# Altium PCB FLY_ADXL345.pcbdoc
Units mm, origin at the board's own origin, x right, y up, seen from the top; angles counter-clockwise.
Board outline 93.98 x 76.2 mm, 2 copper layers (Top Layer, Bottom Layer); 13 components, 13 nets, 53 pads, 49 vias.
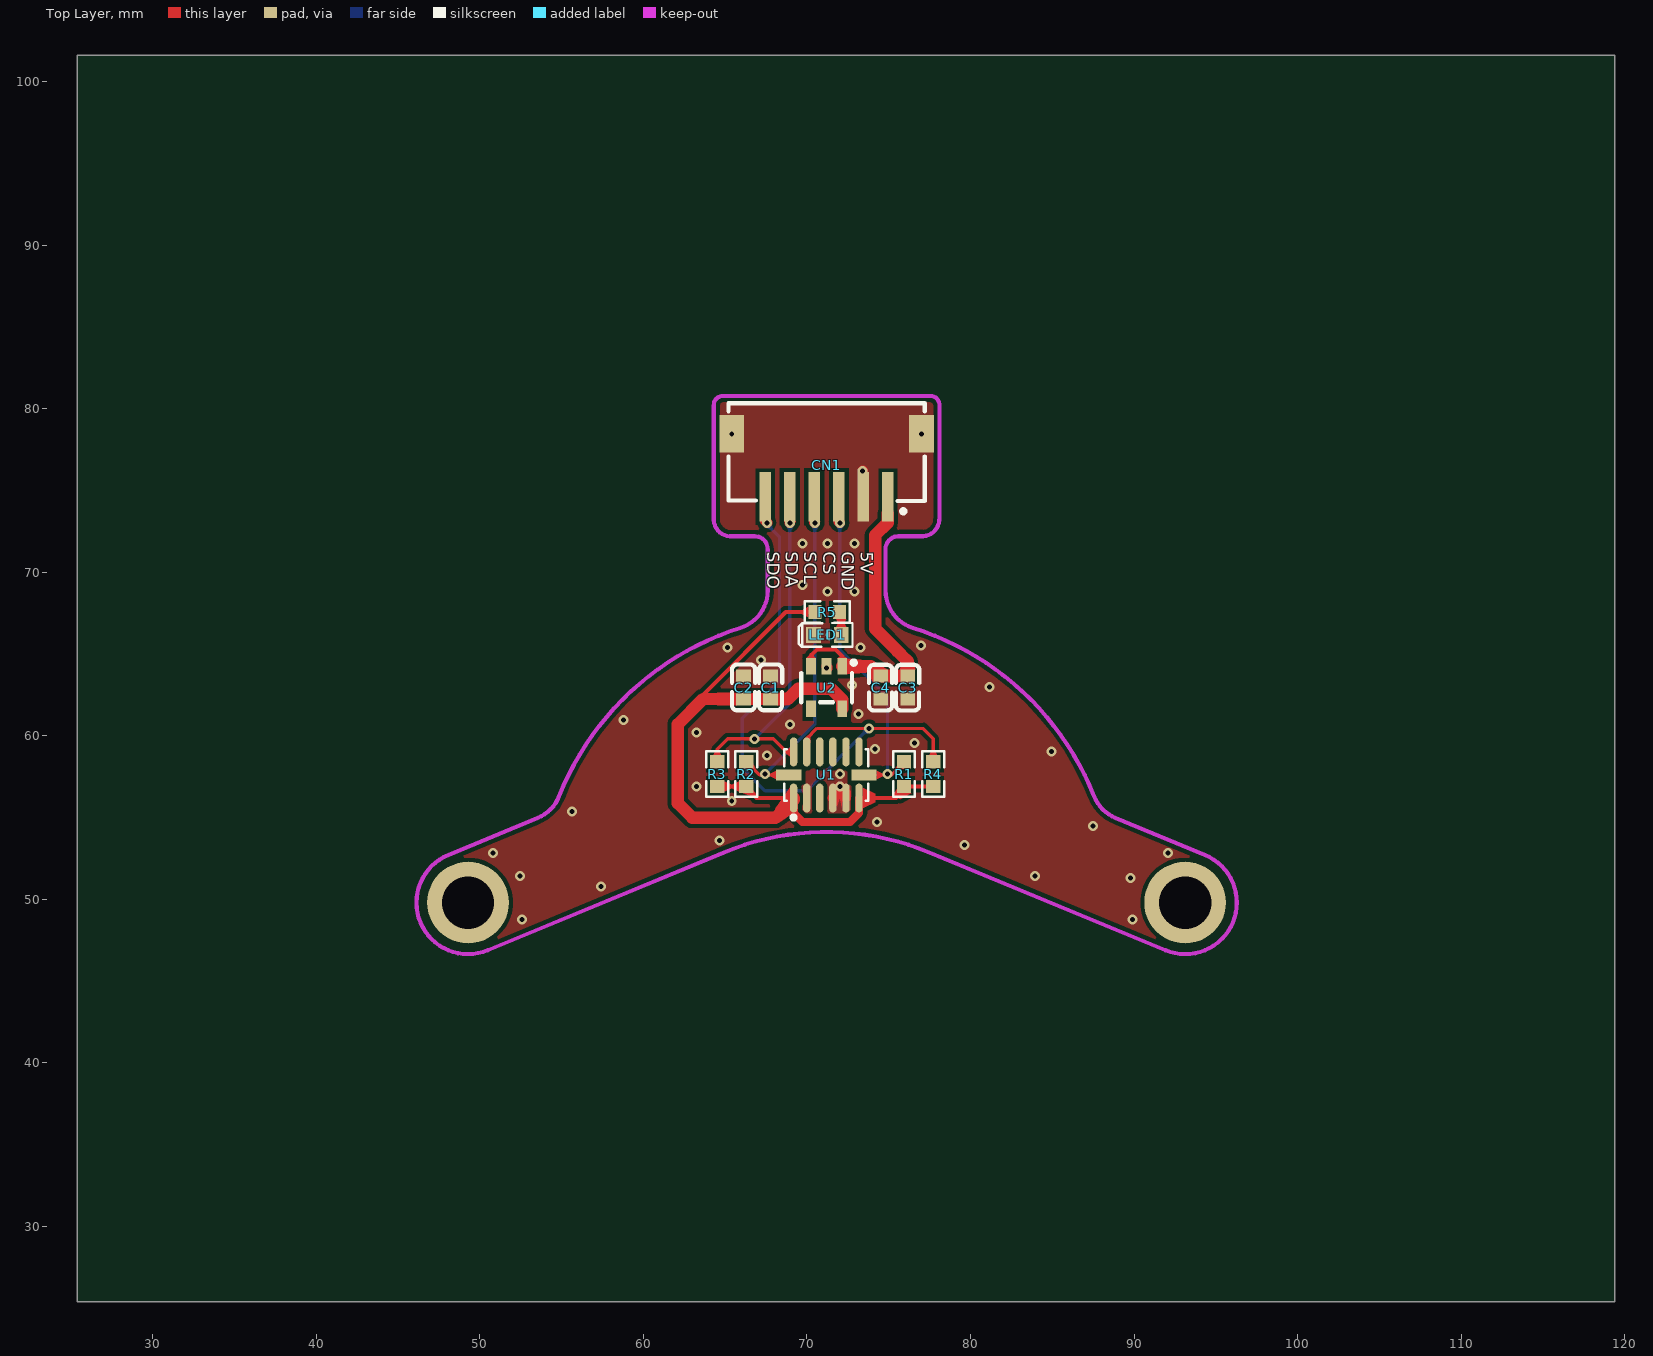
[diagram p0: Top Layer view]
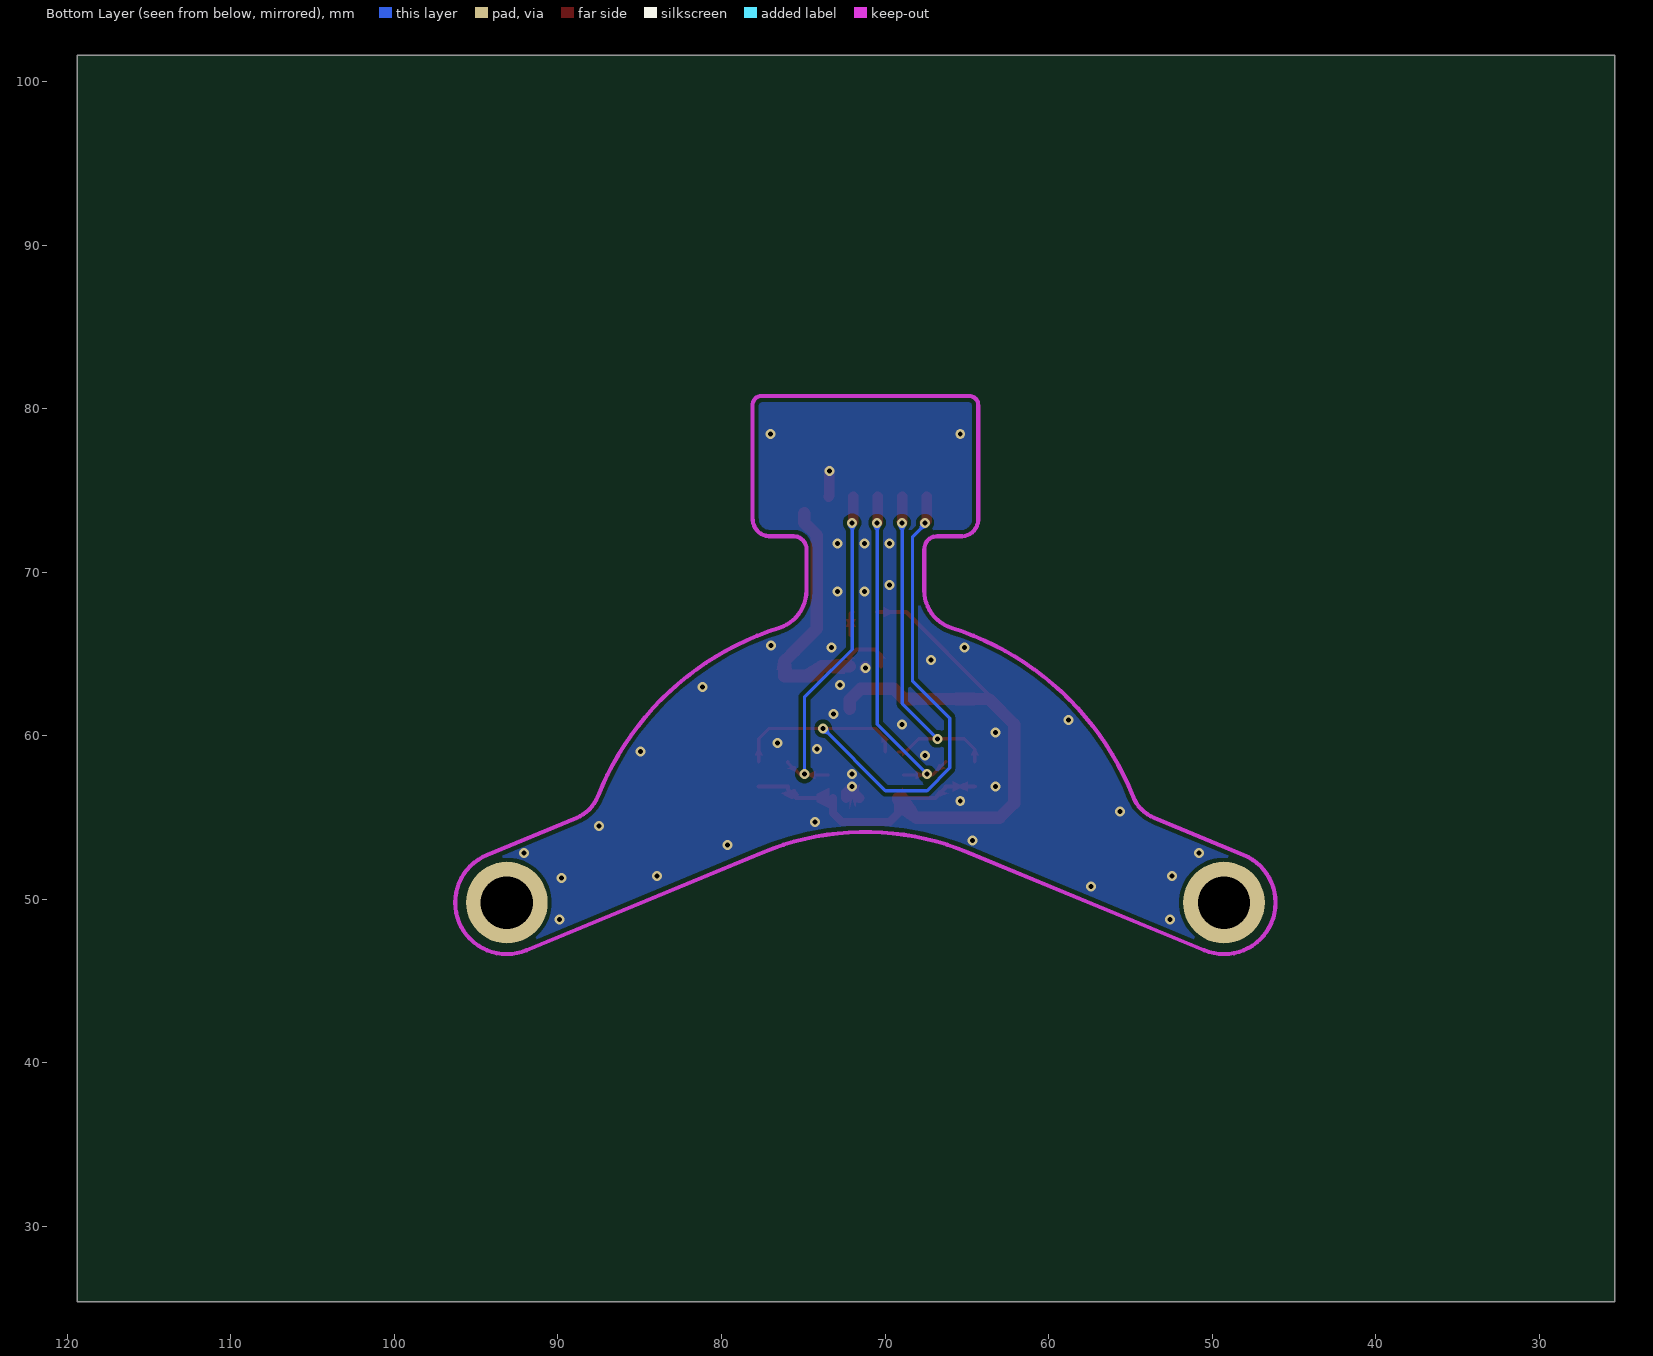
[diagram p1: Bottom Layer view, seen from below]

## Layer stack, top to bottom
Top Solder: solder mask 0.0102, Solder Resist, Dk 3.5
Top Layer: signal copper 0.0356
Dielectric1: dielectric 0.32, FR-4, Dk 4.8
Bottom Layer: signal copper 0.0356
Bottom Solder: solder mask 0.0102, Solder Resist, Dk 3.5

## Board outline
119.38,25.4 25.4,25.4 25.4,101.6 119.38,101.6

## Design rules (kind name [scope] priority, off if disabled: settings)
Clearance [All] p1: gap=0.254 ignorepadtopadclearanceinfootprint=FALSE except(0: Arc-Hole Track-Hole SMDPad-Hole THPad-Hole Via-Hole Fill-Hole Poly-Hole Region-Hole Text-Hole)
PolygonConnect [All] p1: thpad.connectstyle=Relief thpad.reliefconductorwidth=0.254 thpad.reliefentries=4 thpad.polygonreliefangle="90 Angle" thpad.airgapwidth=0.254 smdpad.connectstyle=Direct smdpad.reliefconductorwidth=0.254 smdpad.reliefentries=4 smdpad.polygonreliefangle="90 Angle" smdpad.airgapwidth=0.254 via.connectstyle=Direct via.reliefconductorwidth=0.254 via.reliefentries=4 via.polygonreliefangle="90 Angle" via.airgapwidth=0.254
RoutingVias [All] p1: holewidth=0.711 width=1.27 viastyle="Through Hole" minholewidth=0.711 minwidth=1.27 maxholewidth=0.711 maxwidth=1.27
SolderMaskExpansion [All] p1: expansion=0.102 istentingtop=FALSE
Width [All] p1: maxlimit=0.254 minlimit=0.254 preferedwidth=0.254
30 further rules are at their usual default settings.

## Components (designator, comment, footprint, x,y, rotation, side; value= is the part's Value field where it differs from the comment)
C1 "10uf" C0603 67.776,62.952 r270 top
C2 "100nf" C0603 66.125,62.952 r270 top
C3 "10uf" C0603 76.158,62.952 r90 top
C4 "100nf" C0603 74.507,62.952 r90 top
CN1 "CNJMA1501WR-S-6P" CONN-SMD_CNJMA1501WR-S-6P 71.205,76.541 r180 top
LED1 "LED-0603_R" LED0603_RED 71.247,66.167 r180 top
R1 "10k" R0603 75.946,57.658 r270 top
R2 "4.7k" R0603 66.294,57.658 r270 top
R3 "4.7k" R0603 64.516,57.658 r270 top
R4 "4.7k" R0603 77.724,57.658 r270 top
R5 "1k" R0603 71.247,67.564 r0 top
U1 "ADXL345BCCZ" LGA-14_L5.0-W3.0-P0.80-BL 71.459,57.11 r0 top
U2 "MIC5225-3.3YM5-TR" SOT-23-5_L3.0-W1.7-P0.95-LS2.8-BR 71.205,62.952 r90 top

## Footprints (in the part's own frame and the unit in brackets; to place one, negate y for a bottom-side part, rotate by r counter-clockwise, add the part's x,y. Pads: shape width x height; smd on the part's side, far side on the other; paste and mask are expansions set on the pad)
C0603 [mm]
  rect 0.8x0.9 smd: 1(-0.7,0) 2(0.7,0)
  silkscreen extent -1.41,-0.71 1.39,0.72
CONN-SMD_CNJMA1501WR-S-6P [mm]
  rect 0.7x3 smd: 1(-3.75,1.925) 2(-2.25,1.925) 3(-0.75,1.925) 4(0.75,1.925) 5(2.25,1.925) 6(3.75,1.925)
  rect 1.5x2.3 smd: 7(5.8,-1.925) 8(-5.8,-1.925)
  silkscreen extent -6,-3.79 6,2.94
LED0603_RED [mm]
  rect 0.9x1 smd: 1(-0.85,0) 2(0.85,0)
  silkscreen extent -1.54,-0.73 1.75,0.73
LGA-14_L5.0-W3.0-P0.80-BL [mm]
  oval 0.448x1.769 smd: 1(-2.273,-0.912) 2(-1.473,-0.912) 3(-0.673,-0.912) 4(0.127,-0.912) 5(0.927,-0.912) 6(1.727,-0.912) 8(1.727,1.907) 9(0.927,1.907) 10(0.127,1.907) 11(-0.673,1.907) 12(-1.473,1.907) 13(-2.273,1.907)
  rect 1.545x0.7 smd: 7(2.025,0.497) 14(-2.57,0.497)
  silkscreen extent -2.85,-2.22 2.3,2.07
R0603 [mm]
  rect 0.806x0.864 smd: 1(-0.753,0) 2(0.753,0)
  silkscreen extent -1.39,-0.66 1.39,0.66
SOT-23-5_L3.0-W1.7-P0.95-LS2.8-BR [mm]
  rect 1x0.6 smd: 1(1.3,-0.95) 2(1.3,0) 3(1.3,0.95) 4(-1.3,0.95) 5(-1.3,-0.95)
  silkscreen extent -0.9,-1.78 1.65,1.55

## Free pads (board coordinates)
  round 5 hole 3.2: 1(49.285,49.806) 1(93.125,49.806)
  round 5.08 on Top Solder: 2(49.285,49.806) 2(93.125,49.806)
  round 5.08 on Bottom Solder: 2(49.285,49.806) 2(93.125,49.806)

## Via types
v1: diameter 0.61, hole 0.305, Top Layer to Bottom Layer, 49 vias

## Nets (pads, with @x,y where several pads share a name; then routed paths per layer and width w, separated by ;. In a path a pad name is that pad's centre, name@x,y a point inside that pad or via, vN(x,y) a via of type N, cw(c..) or ccw(c..) an arc to the next point about the centre after c; other vN are vias at no path point)
3V3: C1.2 C2.2 R1.2 R2.2 R3.2 R4.2 R5.1 U1.1 U1.6 U2.5 | length 50
  Top Layer w0.254: 63.65,62.253 63.65,62.507 68.707,67.564 R5.1 ; R3.2 R2.2 66.294,56.832 66.929,56.197 U1.1 ; U1.6 75.438,56.197 75.946,56.706 R1.2 R4.2
  Top Layer w0.508: U1.1 69.187,55.273 69.723,54.737 72.644,54.737 73.188,55.281 U1.6
  Top Layer w0.762: U1.1 69.187,56.106 68.072,54.991 62.992,54.991 62.103,55.88 62.103,60.706 63.65,62.253 C2.2 C1.2 68.857,62.253 69.469,62.865 71.501,62.865 72.156,62.21 U2.5
5V: C3.2 C4.2 CN1.1 U2.1 U2.3 | length 18.9
  Top Layer w0.254: U2.3 70.256,64.922 70.612,65.278 71.755,65.278 72.156,64.877 U2.1
  Top Layer w0.762: U2.1 73.906,64.252 C4.2 C3.2 76.159,64.557 76.073,64.643 75.536,65.18 74.168,66.548 74.168,72.263 74.945,73.04 CN1.1@74.945,73.616
CS: CN1.3 R1.1 U1.7 | length 32.2
  Top Layer w0.203: U1.7 75.184,57.607 75.946,58.369 R1.1
  Top Layer w0.635: CN1.3 71.956,73.078 v1(72.009,73.025)
  Bottom Layer w0.203: 74.422,62.865 72.009,65.278 ; v1(74.93,57.658) 74.93,62.357 72.009,65.278 ; 72.009,65.278 v1(72.009,73.025) 72.009,65.278
GND: C1.1 C2.1 C3.1 C4.1 CN1.2 CN1.7 CN1.8 LED1.2 U1.2 U1.4 U1.5 U2.2 | length 3.5
  Top Layer w0.635: U2.2 71.247,64.211 U2.2@71.247,64.135 ; U1.4 72.009,56.619 v1(72.009,56.896) 72.387,56.518 U1.5 ; v1(73.406,76.2) 73.406,74.666 CN1.2
  other v1: 52.578,48.768 89.916,48.768 57.404,50.8 89.789,51.308 52.451,51.435 83.947,51.435 50.8,52.832 92.075,52.832 79.629,53.34 64.643,53.594 87.503,54.483 74.295,54.737 55.626,55.372 65.405,56.007 63.246,56.896 72.009,57.658 67.564,58.801 84.963,59.055 74.168,59.182 76.581,59.563 63.246,60.198 68.961,60.706 58.801,60.96 73.152,61.341 81.153,62.992 72.771,63.119 71.196,64.135 67.183,64.643 65.151,65.405 73.279,65.405 76.962,65.532 71.247,68.834 72.898,68.834 69.723,69.215 69.723,71.755 71.247,71.755 72.898,71.755 65.405,78.466 77.005,78.466
R5_2: LED1.1 R5.2 | length 1.4
  Top Layer w0.254: R5.2 72.098,67.467 LED1.1
S$679: 
S$681: 
S$688: 
S$690: 
S$696: 
SCL: CN1.4 R2.1 U1.14 | length 21.2
  Top Layer w0.203: R2.1 67.099,57.607 U1.14
  Top Layer w0.635: CN1.4 70.455,73.055 v1(70.485,73.025)
  Bottom Layer w0.203: v1(67.437,57.658) 70.485,60.706 v1(70.485,73.025)
SDA: CN1.5 R3.1 U1.13 | length 21.7
  Top Layer w0.203: R3.1 64.516,59.182 65.151,59.817 67.945,59.817 68.745,59.017 U1.13
  Top Layer w0.635: CN1.5 v1(68.961,73.025)
  Bottom Layer w0.203: v1(66.802,59.817) 68.961,61.976 v1(68.961,73.025)
SDO: CN1.6 R4.1 U1.12 | length 38.3
  Top Layer w0.203: U1.12 69.987,59.827 70.612,60.452 77.089,60.452 77.724,59.817 R4.1
  Top Layer w0.635: CN1.6 67.455,73.134 v1(67.564,73.025)
  Bottom Layer w0.203: v1(67.564,73.025) 67.564,72.898 68.326,72.136 68.326,63.373 66.04,61.087 66.04,58.039 67.437,56.642 69.977,56.642 v1(73.787,60.452)
pads on no net: U1.3 U1.8 U1.9 U1.10 U1.11 U2.4

## Polygon pours and split planes (outlines as drawn)
GND on Top Layer "GND_L01_P001" (solid, pour order 1): 49.657,46.736 48.387,46.863 47.498,47.244 46.355,48.387 46.101,50.038 46.863,51.943 47.879,52.705 54.229,55.372 54.864,56.388 56.515,59.563 58.547,61.976 60.706,64.008 63.119,65.532 66.421,66.802 67.437,67.818 67.691,69.596 67.564,71.628 67.183,72.136 66.802,72.263 65.278,72.263 64.643,72.517 64.262,73.025 64.262,80.264 64.643,80.772 77.724,80.772 78.105,80.391 78.105,73.152 77.851,72.517 77.47,72.263 75.311,72.136 74.93,71.882 74.803,71.374 74.803,68.707 75.184,67.564 75.819,66.929 76.708,66.548 79.629,65.278 81.28,64.262 82.677,63.246 84.074,61.849 86.106,59.309 87.757,56.007 88.519,55.245 91.567,53.848 95.123,52.324 95.885,51.308 96.266,50.038 96.139,49.022 95.758,48.006 95.123,47.371 94.361,46.863 93.218,46.609 91.567,46.99 75.311,53.721 73.025,54.102 70.485,54.102 68.707,53.975 64.135,52.578 50.673,46.99
GND on Bottom Layer "GND_L02_P002" (solid, pour order 2): 49.657,46.736 48.387,46.863 47.498,47.244 46.355,48.387 46.101,50.038 46.863,51.943 47.879,52.705 54.229,55.372 54.864,56.388 56.515,59.563 58.547,61.976 60.706,64.008 63.119,65.532 66.421,66.802 67.437,67.818 67.691,69.596 67.564,71.628 67.183,72.136 66.802,72.263 65.278,72.263 64.643,72.517 64.262,73.025 64.262,80.264 64.643,80.772 77.724,80.772 78.105,80.391 78.105,73.152 77.851,72.517 77.47,72.263 75.311,72.136 74.93,71.882 74.803,71.374 74.803,68.707 75.184,67.564 75.819,66.929 76.708,66.548 79.629,65.278 81.28,64.262 82.677,63.246 84.074,61.849 86.106,59.309 87.757,56.007 88.519,55.245 91.567,53.848 95.123,52.324 95.885,51.308 96.266,50.038 96.139,49.022 95.758,48.006 95.123,47.371 94.361,46.863 93.218,46.609 91.567,46.99 75.311,53.721 73.025,54.102 70.485,54.102 68.707,53.975 64.135,52.578 50.673,46.99

## Keep-outs
Keep-Out Layer:
  lines w0.254: 65.305,72.206 66.805,72.206 cw(c66.805,71.406) 67.605,71.406 67.605,68.884 cw(c65.205,68.884) 65.925,66.595 ccw(c71.205,49.806) 54.85,56.308 cw(c52.62,57.194) 53.539,54.977 48.08,52.716 ccw(c49.279,49.803) 50.491,46.895 64.929,52.876 cw(c71.205,37.725) 77.481,52.876 91.92,46.896 ccw(c93.131,49.803) 94.331,52.716 88.872,54.977 cw(c89.791,57.194) 87.56,56.308 ccw(c71.205,49.806) 76.485,66.595 cw(c77.205,68.884) 74.805,68.884 74.805,71.406 cw(c75.605,71.406) 75.605,72.206 77.105,72.206 ccw(c77.055,73.239) 78.089,73.206 ; 65.458,72.193 cw(c65.355,73.239) 64.305,73.206 64.305,80.206 cw(c64.855,80.224) 64.855,80.774 77.555,80.774 ; 77.555,80.774 cw(c77.555,80.224) 78.105,80.206 78.105,73.206

## Other copper
Top Layer:
  region net GND: 72.163,55.537 72.163,56.858 72.233,57.121 71.954,56.502
  region net GND: 71.547,57.078 71.811,55.628 72.009,56.17 71.785,56.844
  region net SDA: 69.305,73.116 68.605,73.116 68.638,73.031 69.273,73.031
  region net SCL: 70.805,73.116 70.105,73.116 70.138,73.054 70.773,73.054
  region net CS: 72.305,73.116 71.605,73.116 71.638,73.079 72.273,73.079
  region net CS: 72.21,73.254 71.756,73.195 71.854,73.423 72.057,73.45
  region net CS: 72.209,73.116 71.701,73.116 71.854,73.079 72.057,73.079
  region net SDO: 70.191,59.583 69.783,59.77 70.015,59.999 70.212,59.909
  region net SDO: 77.978,58.814 77.47,58.814 77.622,59.119 77.826,59.119
  region net CS: 75.995,58.008 75.514,58.172 75.341,57.908 75.556,57.835
  region net CS: 74.257,57.353 74.257,57.861 74.562,57.708 74.562,57.505
  region net SDA: 68.963,58.763 68.963,59.271 68.745,59.119 68.745,58.915
  region net SDA: 64.77,58.814 64.262,58.814 64.414,59.119 64.618,59.119
  region net SCL: 66.726,58.29 66.304,58.008 66.673,57.888 66.846,58.003
  region net SCL: 68.117,57.861 68.117,57.353 67.812,57.505 67.812,57.708
  region net 3V3: 68.227,62.652 68.227,61.852 68.857,61.872 68.857,62.634
  region net 3V3: 65.862,56.587 65.862,57.222 65.481,57.032 65.481,56.778
  region net 3V3: 64.948,57.222 64.948,56.587 65.329,56.778 65.329,57.032
  region net 3V3: 66.726,56.673 66.114,56.502 66.682,56.265 66.963,56.343
  region net 3V3: 68.963,55.88 68.963,56.515 68.582,56.324 68.582,56.07
  region net 3V3: 69.225,55.316 68.963,56.834 68.072,55.53 68.341,54.722
  region net 3V3: 65.674,61.852 65.674,62.652 64.531,62.634 64.531,61.872
  region net 3V3: 76.378,56.502 75.514,56.778 75.258,56.377 75.71,56.11
  region net 3V3: 73.411,56.832 73.411,55.562 74.173,55.943 74.173,56.451
  region net 5V: 74.057,63.252 74.957,64.052 74.192,64.506 73.638,63.983
  region net 5V: 72.455,64.752 72.455,63.752 73.598,63.871 73.598,64.633
  region net 5V: 75.708,63.252 75.708,64.052 74.565,64.033 74.565,63.271
  region net 5V: 74.957,64.052 74.957,63.252 76.1,63.271 76.1,64.033
  region net 5V: 75.708,64.052 76.608,64.052 76.539,64.558 75.777,64.558
  region net 5V: 71.855,64.752 72.455,64.752 72.283,64.877 72.029,64.877
  region net 5V: 69.955,64.752 70.555,64.752 70.383,64.922 70.129,64.922
  region net R5_2: 71.78,66.667 72.415,66.667 72.224,67.048 71.97,67.048
  region net R5_2: 72.405,67.132 71.78,67.132 71.97,66.751 72.224,66.751
  region net 3V3: 70.09,67.882 70.09,67.246 69.709,67.437 69.709,67.691
Bottom Layer:
  region net SDO: 73.806,60.148 73.483,60.471 73.422,60.23 73.565,60.087
  region net SDO: 67.48,72.732 67.865,72.978 67.875,72.731 67.699,72.619
  region net SDA: 68.732,72.823 69.19,72.823 69.063,72.61 68.859,72.61
  region net SCL: 70.256,72.823 70.714,72.823 70.587,72.61 70.383,72.61
  region net CS: 71.78,72.823 72.238,72.823 72.111,72.61 71.907,72.61

## Silkscreen, mask and mechanical layers (free items; w line width, h text height)
Top Overlay:
  text "SDO" at 67.564,71.247 h0.76 r270
  text "SDA" at 68.707,71.247 h0.76 r270
  text "SCL" at 69.85,71.247 h0.76 r270
  text "CS" at 70.993,71.247 h0.76 r270
  text "GND" at 72.136,71.247 h0.76 r270
  text "5V" at 73.279,71.247 h0.76 r270
Top Solder:
  drawing of 4 lines, arcs and shapes, not listed